# EAGLE board sch (EAGLE 8.6.0)
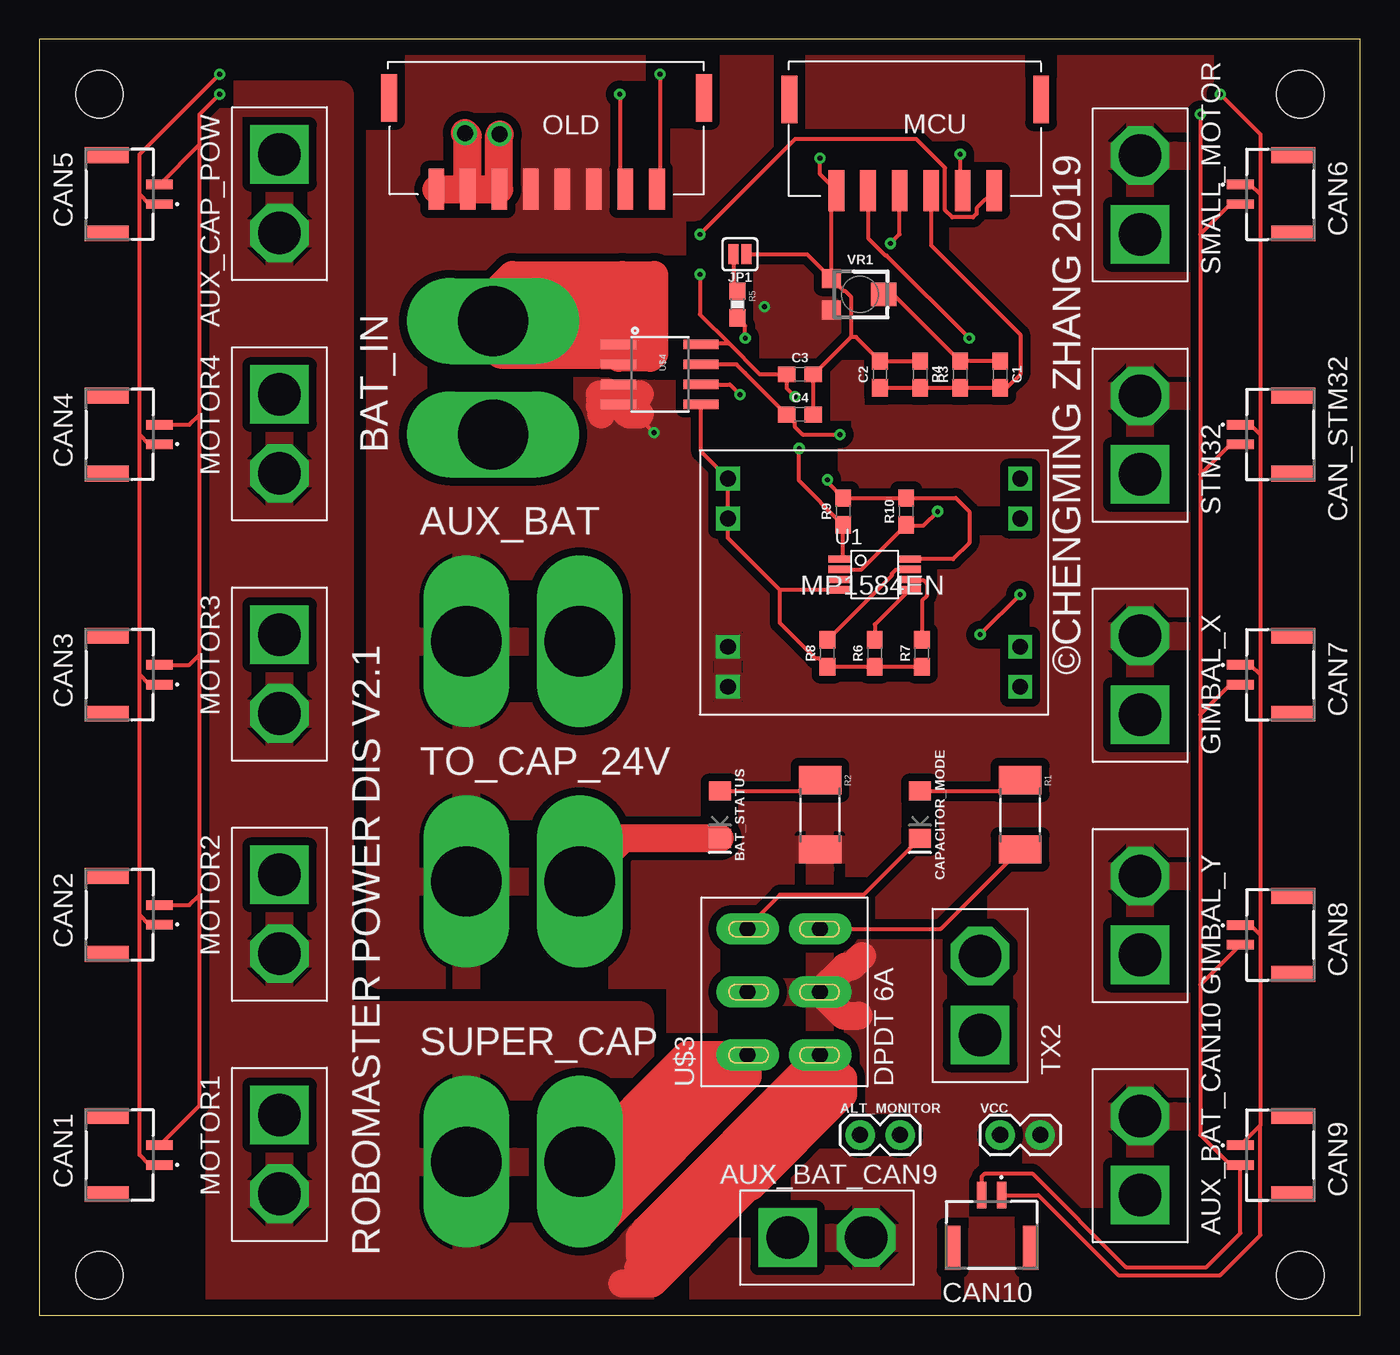
[diagram p0: board, top side]
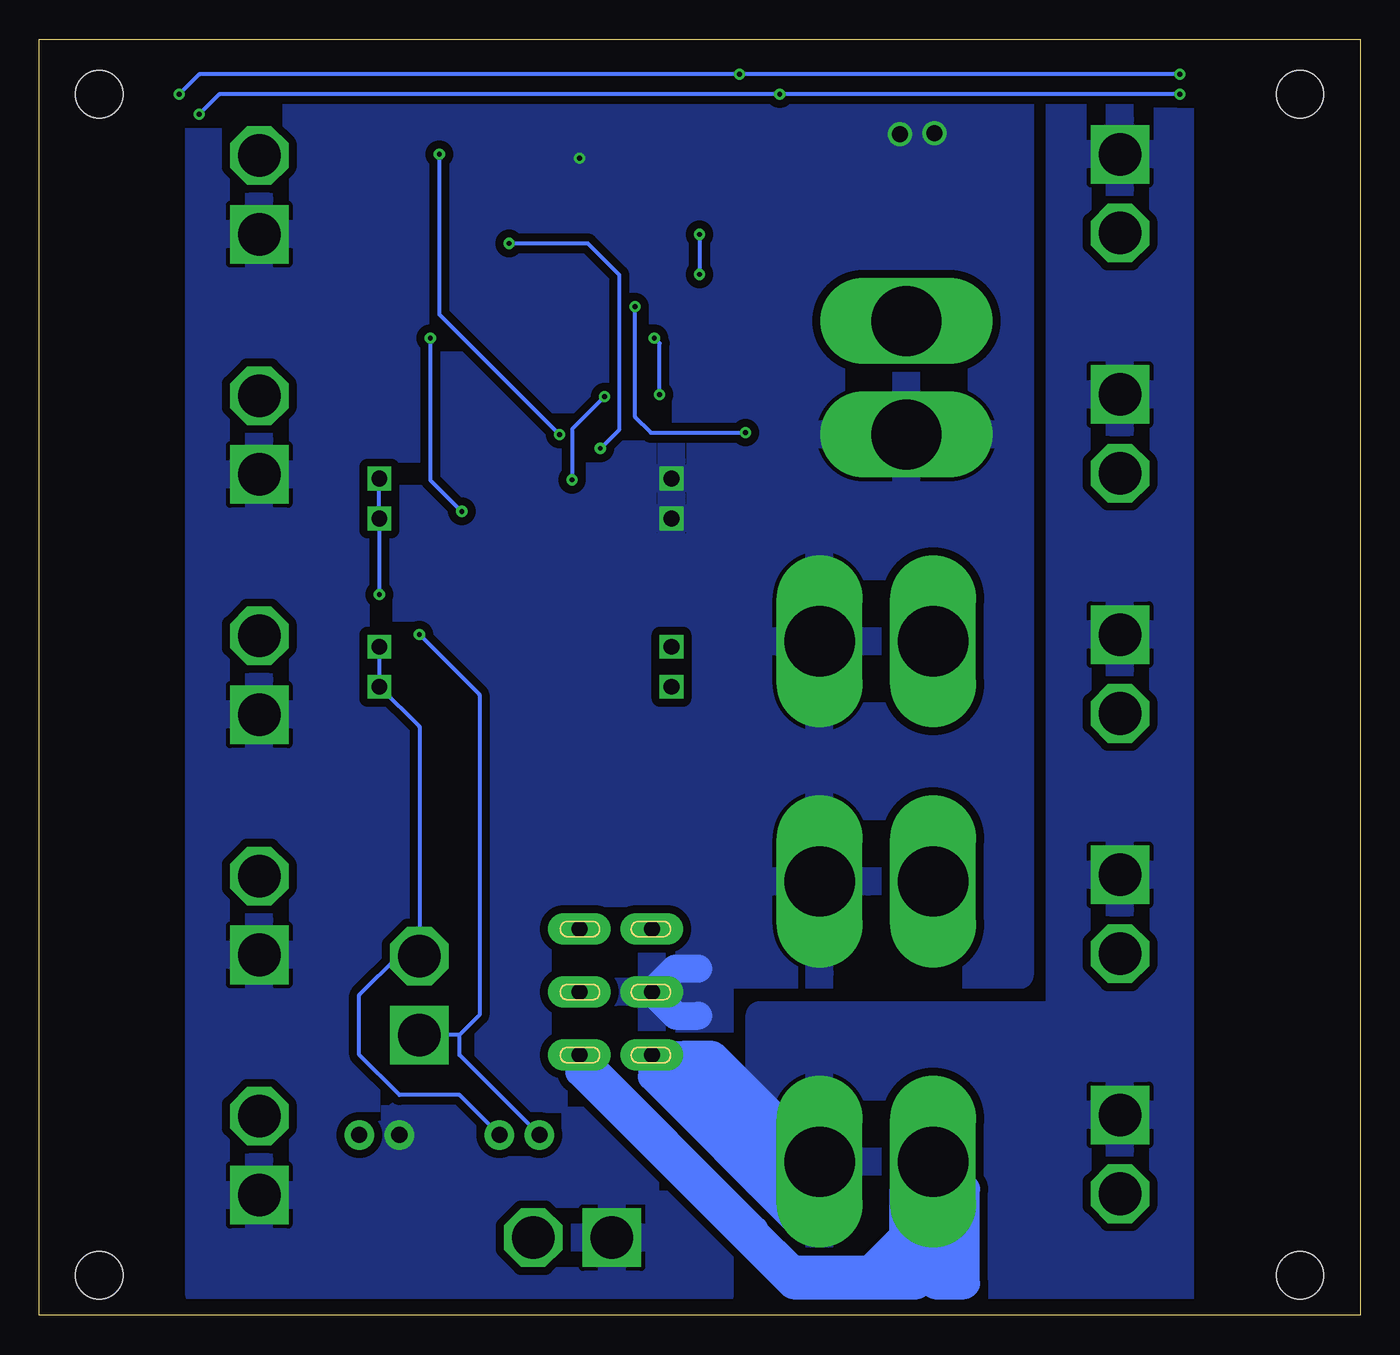
[diagram p1: board, bottom side, seen from below]

Size 83.8 x 80.95 mm. Coordinates in mm from the lower left corner, seen from the top.
Outline: 0,0 83.8,0 83.8,80.95 0,80.95 0,0
Copper layers (1*16): Top 0.035mm / dielectric 1.5mm / Bottom 0.035mm
Design rules "default": minimum track width 6mil, minimum drill 0.35mm, track to track 6mil, track to pad 6mil, pad to pad 6mil, via to via 6mil, smd to smd 6mil, copper to edge 40mil, drill to drill 6mil, minimum pad ring 10mil, minimum via ring 8mil, stop-mask expansion 4mil, vias tented up to drill 0mil, thermal gap 10mil
Net classes: 0 default: width 1.778 mm, drill 1.016 mm, clearance 0.508 mm; 1 sig: width 0.254 mm, drill 0.305 mm, clearance 0.254 mm
Holes 3 mm at 3.81,77.47 80.01,77.47 80.01,2.54 3.81,2.54
Milling: 24 lines

## Footprints (pad centres in the part's own frame; a part is rotated, then mirrored left to right if it is on the bottom)
1X02 = drill 1.016 pad 1.88: 1 0,0; 2 2.54,0
XT60 = drill 4.45 long: 1 -7.2,7.2; 2 0,7.2
XT30 = drill 2.7 square: P$1 0,0 | drill 2.7 octagon: P$2 5,0
LED-1206 = smd 1.2 x 1.4: A -1.5,0; C 1.5,0
0603 = smd 1.1 x 1: 1 -0.85,0; 2 0.85,0
BM02B-GHS-TBT_1 = smd 0.6 x 1.7: 1 0.625,0; 2 -0.625,0 | smd 1 x 2.8: 3 -2.475,-3.35; 4 2.475,-3.35
SMT-JUMPER_2_NO_SILK = smd 0.635 x 1.27: 1 -0.406,0; 2 0.406,0
S6B-PH-SM4_TB = smd 1 x 2.6: 1 5.46,9.68; 2 7.46,9.68; 3 9.46,9.68; 4 11.46,9.68; 5 13.46,9.68; 6 15.46,9.68 | smd 1 x 3: GND 2.476,3.88; GND2 18.444,3.88
S8B-PH-SM4_TB = smd 1 x 2.6: 1 4,7.3; 2 6,7.3; 3 8,7.3; 4 10,7.3; 5 12,7.3; 6 14,7.3; 7 16,7.3; 8 18,7.3 | smd 1 x 3: 9 1.016,1.5; 10 20.984,1.5
R2010 = smd 1.8 x 2.7: 1 -2.2,0; 2 2.2,0
0603-RES = smd 1.1 x 1: 1 -0.85,0; 2 0.85,0
MSOP-8 = smd 1.45 x 0.45: 1 -2.2,0.975; 2 -2.2,0.325; 3 -2.2,-0.325; 4 -2.2,-0.975; 5 2.2,-0.975; 6 2.2,-0.325; 7 2.2,0.325; 8 2.2,0.975
MP1584_AMAZON = drill 1 square: 1 1.778,14.986; 2 1.778,12.446; 3 1.778,4.318; 4 1.778,1.778; 5 20.32,14.986; 6 20.32,12.446; 7 20.32,4.318; 8 20.32,1.778
DPDT = drill 1 pad 2 long: P$1 0,0; P$2 4,0; P$3 8,0; P$4 0,4.6; P$5 4,4.6; P$6 8,4.6
SO08 = smd 0.61 x 2.21: 1 -1.905,-2.616; 2 -0.635,-2.616; 3 0.635,-2.616; 4 1.905,-2.616; 5 1.905,2.616; 6 0.635,2.616; 7 -0.635,2.616; 8 -1.905,2.616
TRIMPOT-SMD-TC33X = smd 1.2 x 1.2: 1 -1,-1.825; 3 1,-1.825 | smd 1.5 x 1.6: 2 0,1.5

## Placement (x,y rotation side)
ALT_MONITOR  [1X02]  52.07,11.43 0 top
AUX_BAT  XT60  [XT60]  34.29,35.56 0 top
AUX_BAT_CAN9  XT30  [XT30]  47.47,4.92 0 top
AUX_BAT_CAN10  XT30  [XT30]  69.85,7.62 90 top
AUX_CAP_POW  XT30  [XT30]  15.24,73.66 270 top
BAT_IN  XT60  [XT60]  21.59,55.88 270 top
BAT_STATUS  3V 20mA  [LED-1206]  43.18,31.75 270 top
C1  0.1uF  [0603]  60.96,59.69 270 top
C2  0.1uF  [0603]  53.34,59.69 90 top
C3  0.1uF  [0603]  48.26,59.69 0 top
C4  1nF  [0603]  48.26,57.15 0 top
CAN1  BM02B-GHS-TBT(LF)(SN)  [BM02B-GHS-TBT_1]  7.62,10.16 270 top
CAN2  BM02B-GHS-TBT(LF)(SN)  [BM02B-GHS-TBT_1]  7.62,25.4 270 top
CAN3  BM02B-GHS-TBT(LF)(SN)  [BM02B-GHS-TBT_1]  7.62,40.64 270 top
CAN4  BM02B-GHS-TBT(LF)(SN)  [BM02B-GHS-TBT_1]  7.62,55.88 270 top
CAN5  BM02B-GHS-TBT(LF)(SN)  [BM02B-GHS-TBT_1]  7.62,71.12 270 top
CAN6  BM02B-GHS-TBT(LF)(SN)  [BM02B-GHS-TBT_1]  76.2,71.12 90 top
CAN7  BM02B-GHS-TBT(LF)(SN)  [BM02B-GHS-TBT_1]  76.2,40.64 90 top
CAN8  BM02B-GHS-TBT(LF)(SN)  [BM02B-GHS-TBT_1]  76.2,24.13 90 top
CAN9  BM02B-GHS-TBT(LF)(SN)  [BM02B-GHS-TBT_1]  76.2,10.16 90 top
CAN10  BM02B-GHS-TBT(LF)(SN)  [BM02B-GHS-TBT_1]  60.42,7.62 0 top
CAN_STM32  BM02B-GHS-TBT(LF)(SN)  [BM02B-GHS-TBT_1]  76.2,55.88 90 top
CAPACITOR_MODE  3V 20mA  [LED-1206]  55.88,31.75 270 top
GIMBAL_X  XT30  [XT30]  69.85,38.1 90 top
GIMBAL_Y  XT30  [XT30]  69.85,22.86 90 top
JP1  JUMPER-SMT_2_NO_SILK  [SMT-JUMPER_2_NO_SILK]  44.45,67.31 180 top
MCU  S6B-PH-SM4_TB  [S6B-PH-SM4_TB]  66.04,81.03 180 top
MOTOR1  XT30  [XT30]  15.24,12.7 270 top
MOTOR2  XT30  [XT30]  15.24,27.94 270 top
MOTOR3  XT30  [XT30]  15.24,43.18 270 top
MOTOR4  XT30  [XT30]  15.24,58.42 270 top
OLD  S8B-PH-SM4_TB  [S8B-PH-SM4_TB]  43.18,78.74 180 top
R1  1.2K  [R2010]  62.23,31.75 270 top
R2  1.2K  [R2010]  49.53,31.75 270 top
R3  10k  [0603]  58.42,59.69 90 top
R4  2.0k  [0603]  55.88,59.69 270 top
R5  4.7K  [0603-RES]  44.29,64.13 270 top
R6  10k  [0603]  53,42 90 top
R7  10k  [0603]  56,42 90 top
R8  10k  [0603]  50,42 90 top
R9  10k  [0603]  51,51 90 top
R10  10k  [0603]  55,51 90 top
SMALL_MOTOR  XT30  [XT30]  69.85,68.58 90 top
STM32  XT30  [XT30]  69.85,53.34 90 top
SUPER_CAP  XT60  [XT60]  34.29,2.54 0 top
TO_CAP_24V  XT60  [XT60]  34.29,20.32 0 top
TX2  XT30  [XT30]  59.69,17.78 90 top
U1  MCP9808MSOP  [MSOP-8]  53,47 0 top
U$2  MP1584  [MP1584_AMAZON]  41.91,38.1 0 top
U$3  DPDT  [DPDT]  49.53,16.51 90 top
U$4  ACS723  [SO08]  39.37,59.69 270 top
VCC  [1X02]  60.96,11.43 0 top
VR1  10k  [TRIMPOT-SMD-TC33X]  52.07,64.77 270 top

## Library data of the parts
ALT_MONITOR VCC = SparkFun-Connectors
AUX_BAT AUX_BAT_CAN9 AUX_BAT_CAN10 AUX_CAP_POW BAT_IN GIMBAL_X GIMBAL_Y MCU MOTOR1-MOTOR4 SMALL_MOTOR STM32 SUPER_CAP TO_CAP_24V TX2 U$2 U$3 = NewKevinMade
BAT_STATUS CAPACITOR_MODE = SparkFun-LED
C1-C3 = SparkFun-Capacitors; PROD_ID: CAP-00810
C4 = SparkFun-Capacitors; PROD_ID: CAP-07886
CAN1-CAN10 CAN_STM32 = SamacSys_Parts; DESCRIPTION: GH 1.25mm header top entry 2 way JST GH Series, 1.25mm Pitch 2 Way Shrouded Straight PCB Header, Surface Mount, Solder Termination; HEIGHT: mm; MANUFACTURER_NAME: JST (JAPAN SOLDERLESS TERMINALS); MANUFACTURER_PART_NUMBER: BM02B-GHS-TBT(LF)(SN); RS_PART_NUMBER: 7521762P
JP1 = SparkFun-Jumpers
OLD = KevinMade
R1 R2 = SparkFun-Passives
R3 R6-R10 = SparkFun-Resistors; PROD_ID: RES-00824
R4 = SparkFun-Resistors; PROD_ID: RES-08296
R5 = SparkFun-Resistors; PROD_ID: RES-07857
U1 = MCP9808; AVAILABILITY: Unavailable; DESCRIPTION: MCP9808 Series SMD 3.6 V Memory Module Digital Temperature Sensor - MSOP-8; MF: Microchip; MP: MCP9808-E/MS; PACKAGE: MSOP-8 Microchip; PRICE: None
U$4 = SparkFun-Sensors; PART_#: ACS723ACS723LLCTR-05AB-T2; PROD_ID: IC-13872
VR1 = SparkFun-Resistors; PROD_ID: RES-12428, RES-08048

## Nets
ALT_GND [sig]: ALT_MONITOR.1 TX2.P$1 U$2.5 U$2.6
ALT_VCC [sig]: ALT_MONITOR.2 TX2.P$2 U$2.7 U$2.8
ANALOG_OUT [sig]: C1.2 C2.1 MCU.3 R3.1 R4.2
BAT_24V: AUX_BAT.1 AUX_BAT_CAN9.P$2 AUX_BAT_CAN10.P$2 GIMBAL_X.P$2 GIMBAL_Y.P$2 OLD.3 OLD.4 OLD.5 R2.2 SMALL_MOTOR.P$2 STM32.P$2 TO_CAP_24V.1 U$2.3 U$2.4 U$3.P$2 U$4.3 U$4.4 VCC.2 VR1.3
BAT_GND: AUX_BAT.2 AUX_BAT_CAN9.P$1 AUX_BAT_CAN10.P$1 BAT_IN.2 BAT_STATUS.C C2.2 C3.2 C4.2 GIMBAL_X.P$1 GIMBAL_Y.P$1 JP1.1 MCU.6 OLD.6 OLD.7 OLD.8 R4.1 R6.1 R7.1 R8.1 SMALL_MOTOR.P$1 STM32.P$1 TO_CAP_24V.2 U1.4 U$2.1 U$2.2 U$3.P$5 U$4.5 VCC.1 VR1.1
BAT_IN: BAT_IN.1 U$4.1 U$4.2
BW_SEL [sig]: R5.2 U$4.6
CANH [sig]: CAN1.2 CAN2.2 CAN3.2 CAN4.2 CAN5.2 CAN6.2 CAN7.2 CAN8.2 CAN9.2 CAN10.2 CAN_STM32.2 OLD.2
CANL [sig]: CAN1.1 CAN2.1 CAN3.1 CAN4.1 CAN5.1 CAN6.1 CAN7.1 CAN8.1 CAN9.1 CAN10.1 CAN_STM32.1 OLD.1
CAP_24V: AUX_CAP_POW.P$2 MOTOR1.P$2 MOTOR2.P$2 MOTOR3.P$2 MOTOR4.P$2 SUPER_CAP.1 U$3.P$1
CAP_GND: AUX_CAP_POW.P$1 MOTOR1.P$1 MOTOR2.P$1 MOTOR3.P$1 MOTOR4.P$1 SUPER_CAP.2 U$3.P$4
MCU_VCC [sig]: C3.1 MCU.1 R9.2 R10.2 U1.8 U$4.8
N$1 [sig]: R1.2 U$3.P$3
N$2 [sig]: CAPACITOR_MODE.A R1.1
N$3 [sig]: CAPACITOR_MODE.C U$3.P$6
N$4 [sig]: JP1.2 R5.1
N$5 [sig]: BAT_STATUS.A R2.1
N$8 [sig]: C1.1 R3.2 VR1.2
N$13 [sig]: R8.2 U1.7
N$14 [sig]: R7.2 U1.6
N$15 [sig]: R6.2 U1.5
SCL [sig]: MCU.5 R10.1 U1.2
SDA [sig]: MCU.4 R9.1 U1.1
VIOUT [sig]: C4.1 MCU.2 U$4.7

## Tracks (layer width: path | path; a pad name or v marks a point on that pad's centre or on a via)
ALT_GND  (via drill 0.3)
  Top 0.254: v62.23,45.72 v59.69,43.18
  Bottom 0.254: U$2.5 U$2.6 v62.23,45.72 | v59.69,43.18 55.88,39.37 55.88,19.05 57.15,17.78 | 57.15,17.78 TX2.P$1 | ALT_MONITOR.1 57.15,16.51 57.15,17.78
ALT_VCC
  Bottom 0.254: U$2.7 U$2.8 59.69,37.34 59.69,22.86 | 59.69,22.86 TX2.P$2 | ALT_MONITOR.2 57.15,13.97 60.96,13.97 63.5,16.51 63.5,20.32 60.96,22.86 59.69,22.86
ANALOG_OUT
  Top 0.254: C2.1 R4.2 R3.1 C1.2 | C1.2 60.96,58.95 | MCU.3 56.58,67.88 62.23,62.23 62.23,59.69 61.38,58.84 C1.2
BAT_24V  (via drill 0.3)
  Top 0.254: v39,56 38.1,56.9 38.1,57.15
  Top 0.381: 36.75,58.98 U$4.3
  Top 0.762: U$4.4 36.75,58.98
  Top 1.778: 36.75,58.47 U$4.4 | U$4.4 37.39,58.42 38.1,58.42 | U$4.4 37.39,57.15 38.1,57.15 | U$4.4 36.2,57.78 35.56,58.42 35.56,57.68 35.65,57.59 35.65,57.15 | 52,19 51.04,19 U$3.P$2 51.13,22.11 51.52,22.11 52.2,22.8
  Bottom 0.254: v39,56 45,56 46,57 v46,64
  pour Top: 21.59,80.01 21.59,21.59 39.37,21.59 40.64,21.59 40.64,0 73.66,0 73.66,80.01
BAT_GND  (via drill 0.3, 1.02)
  Top 0.254: v49.53,73.41 49.53,72.4 MCU.6 50.24,71.01 VR1.1 | U$4.5 41.99,54.79 U$2.1 U$2.2 43.69,49.31 46.98,46.02 | VR1.1 51.01,65 51.11,65 51.48,64.63 51.48,62.06 | 51.48,62.06 C3.2 C4.2 | 51.48,62.06 51.82,62.06 C2.2 R4.1 | JP1.1 48.7,67.31 VR1.1 | R7.1 R6.1 R8.1 49.48,41.66 49.24,41.66 46.98,43.93 46.98,46.02 | U1.4 46.98,46.02
  Top 1.778: OLD.8 OLD.7 | OLD.7 OLD.6 29.18,74.9 v29.21,74.93 | BAT_STATUS.C 37.02,30.25 TO_CAP_24V.2 | OLD.7 27.18,74.82 v27,75
  Bottom 1.778: 42,19 43.42,19 U$3.P$5 43.44,22 42,22
  pour Bottom: 21.59,80.01 21.59,21.59 40.64,21.59 40.64,1.27 73.66,1.27 73.66,80.01
BAT_IN
  Top 0.889: 36.75,60.76 U$4.2
  Top 1.778: BAT_IN.1 35.27,63.08 U$4.1 36.75,60.76 | 31.75,62.23 34.29,62.23 35.56,60.96 29.21,60.96 28.79,61.38 BAT_IN.1 | BAT_IN.1 29.64,62.23 30.48,62.23 | BAT_IN.1 29.71,64 36,64 37,63 | 37,63 37,61 36.76,60.76 | 36.76,60.76 36.75,60.76 | BAT_IN.1 30.71,65 36,65 37,64 | 37,64 37,63 | BAT_IN.1 28.79,64.79 30,66 37,66 | 37,66 37,64 | 37,66 39,66 39,61 38.76,60.76 36.76,60.76 | 36.75,60.76 38,62 38,65
BW_SEL  (via drill 0.3)
  Top 0.254: U$4.6 43.81,59.05 v44.45,58.42 | v44.78,62 44.78,62.79 R5.2
  Bottom 0.254: v44.78,62 44.45,61.67 v44.45,58.42
CANH  (via drill 0.3)
  Top 0.254: CAN1.2 10.16,13.32 10.16,26.67 | v11.43,77.47 10.16,76.2 10.16,74.28 | v73.66,76.2 73.66,68.58 | 73.66,68.58 73.66,53.34 | 73.66,53.34 73.66,38.1 | 73.66,38.1 73.66,20.96 | 73.66,20.96 73.66,11.43 75.56,9.54 CAN9.2 76.2,5.2 74.05,3.05 68.95,3.05 63,9 60,9 59.8,8.79 CAN10.2 | 10.16,26.67 10.16,41.91 | 10.16,41.91 10.16,57.15 | 10.16,57.15 10.16,74.28 | CAN2.2 9.52,26.02 10.16,26.67 | CAN3.2 9.52,41.27 10.16,41.91 | CAN4.2 9.52,56.51 10.16,57.15 | CAN5.2 10.16,74.28 | v36.83,77.47 36.83,71.79 OLD.2 | CAN6.2 75.58,70.5 73.66,68.58 | CAN_STM32.2 75.58,55.26 73.66,53.34 | CAN7.2 75.58,40.02 73.66,38.1 | CAN8.2 73.66,20.96
  Bottom 0.254: v11.43,77.47 v36.83,77.47 72.39,77.47 v73.66,76.2
CANL  (via drill 0.3)
  Top 0.254: CAN1.1 6.97,9.54 6.35,10.16 6.35,25.4 | 6.35,25.4 6.35,40.64 | 6.35,40.64 6.35,55.88 | 6.35,55.88 6.35,71.12 | 6.35,71.12 6.35,73.66 v11.43,78.74 | 77.47,12.05 CAN9.1 | 77.47,71.12 77.47,55.88 | 77.47,55.88 77.47,40.64 | 77.47,40.64 77.47,24.13 | 77.47,24.13 77.47,12.05 | CAN2.1 6.97,24.77 6.35,25.4 | CAN3.1 6.97,40.02 6.35,40.64 | CAN4.1 6.97,55.26 6.35,55.88 | CAN5.1 6.97,70.5 6.35,71.12 | v39.37,78.74 39.37,71.63 OLD.1 | CAN6.1 76.84,71.75 77.47,71.12 | CAN_STM32.1 76.84,56.51 77.47,55.88 | CAN7.1 76.84,41.27 77.47,40.64 | CAN8.1 76.84,24.75 77.47,24.13 | 77.47,12.05 77.47,5.08 74.93,2.54 68.46,2.54 63.38,7.62 CAN10.1 | v74.93,77.47 77.47,74.93 77.47,71.12
  Bottom 0.254: v11.43,78.74 v39.37,78.74 73.66,78.74 v74.93,77.47
CAP_24V
  Top 1.778: U$3.P$1 38.42,5.4 38.42,5.3 38.1,4.98 38.1,3.81 | U$3.P$1 49.53,14.53 38,3 | U$3.P$1 51,15.04 51,14 45.17,8.18 45.03,8.18 38.86,2 37,2
  Bottom 1.778: 36,2.88 38.42,5.3 38.42,5.4 U$3.P$1 49.53,15.44 36,1.91 28.09,1.91 27,3 27,4 27.09,4.09 SUPER_CAP.1 | 36,2.88 35.03,1.91 30,1.91 27.09,4.82 SUPER_CAP.1 | SUPER_CAP.1 29,7.83 29,5 31.12,2.88 36,2.88 | SUPER_CAP.1 26,8.65 26,2.9 27,1.91 25.09,1.91 25,2 25,8 26.74,9.74 SUPER_CAP.1
  pour Top: 11.43,77.47 19.05,77.47 19.05,19.05 38.1,19.05 38.1,0 11.43,0
CAP_GND
  Top 1.778: U$3.P$4 41.06,16.51 SUPER_CAP.2 34,9.45 34,6 35.79,6 44.93,15.14 U$3.P$4 | U$3.P$4 36.42,8 35,8 43.51,16.51 U$3.P$4
  Bottom 1.778: 37.77,13.22 41.06,16.51 43,16.51 | SUPER_CAP.2 34.55,10 38,10 | 38,10 38,13 37.77,13.22 | 38,10 35,7 34,7 | 34,7 34,9.45 SUPER_CAP.2 | SUPER_CAP.2 35.03,9 36,9 36,10 37,11 | U$3.P$4 38.16,9.74 SUPER_CAP.2 | SUPER_CAP.2 36.23,9.74 43,16.51 | SUPER_CAP.2 37.77,13.22 | U$3.P$4 43,16.51 | U$3.P$4 44.93,15.14 35.79,6 34,6 34,7
  pour Bottom: 11.43,77.47 11.43,0 38.1,0 38.1,19.05 19.05,19.05 19.05,77.47
MCU_VCC  (via drill 0.3)
  Top 0.254: U$4.8 41.95,61.63 43.78,61.63 | 43.78,61.63 45.72,59.69 C3.1 47.41,58.81 v47.94,58.28 | MCU.1 59.46,70.23 59.46,69.89 59.24,69.67 57.92,69.67 57.46,70.13 57.46,72.8 55.64,74.62 47.95,74.62 v41.91,68.58 | v41.91,66.04 41.91,63.5 43.78,61.63 | v50,53 50,52.85 R9.2 R10.2 58.15,51.85 59,51 59,49 57.98,47.98 U1.8
  Bottom 0.254: v41.91,68.58 v41.91,66.04 | v47.94,58.28 50,56.22 v50,53
N$1
  Top 0.254: U$3.P$3 57.19,24.51 R1.2
N$2
  Top 0.254: CAPACITOR_MODE.A 61.53,33.25 R1.1
N$3
  Top 0.254: CAPACITOR_MODE.C 52.3,26.67 46.99,26.67 44.93,24.61 U$3.P$6
N$4
  Top 0.254: JP1.2 44.04,65.23 R5.1
N$5
  Top 0.254: BAT_STATUS.A 48.83,33.25 R2.1
N$8
  Top 0.254: VR1.2 54.19,64.77 R3.2 C1.1
N$13
  Top 0.254: U1.7 55.16,47.28 54.32,47.28 54.09,47.06 54.09,46.94 R8.2
N$14
  Top 0.254: U1.6 55.24,46.63 56.08,46.63 56.31,46.41 56.31,45.64 56,45.34 R7.2
N$15
  Top 0.254: U1.5 53,43.83 R6.2
SCL  (via drill 0.3)
  Top 0.254: U1.2 52.17,47.33 54.92,50.08 | 54.92,50.08 R10.1 | v59,62 53.76,67.24 53.69,67.24 52.58,68.35 MCU.5 | v57,51 56.08,50.08 54.92,50.08
  Bottom 0.254: v59,62 59,53 v57,51
SDA  (via drill 0.3)
  Top 0.254: U1.1 51,48.17 R9.1 48.21,52.94 v48.21,55 | v54,68 54.58,68.58 MCU.4
  Bottom 0.254: v48.21,55 47,56.21 47,66 49,68 v54,68
VIOUT  (via drill 0.3)
  Top 0.254: U$4.7 44.23,60.33 44.78,59.78 C4.1 47.92,56.63 47.92,56.39 48.43,55.88 v50.8,55.88 | v58.42,73.66 58.42,71.51 MCU.2
  Bottom 0.254: v50.8,55.88 58.42,63.5 v58.42,73.66

## Text on the board
tNames: ©CHENGMING ZHANG 2019 | ROBOMASTER POWER DIS V2.1